# EAGLE board Retro-Lite-Dock-PCB_Front (EAGLE 9.6.1)
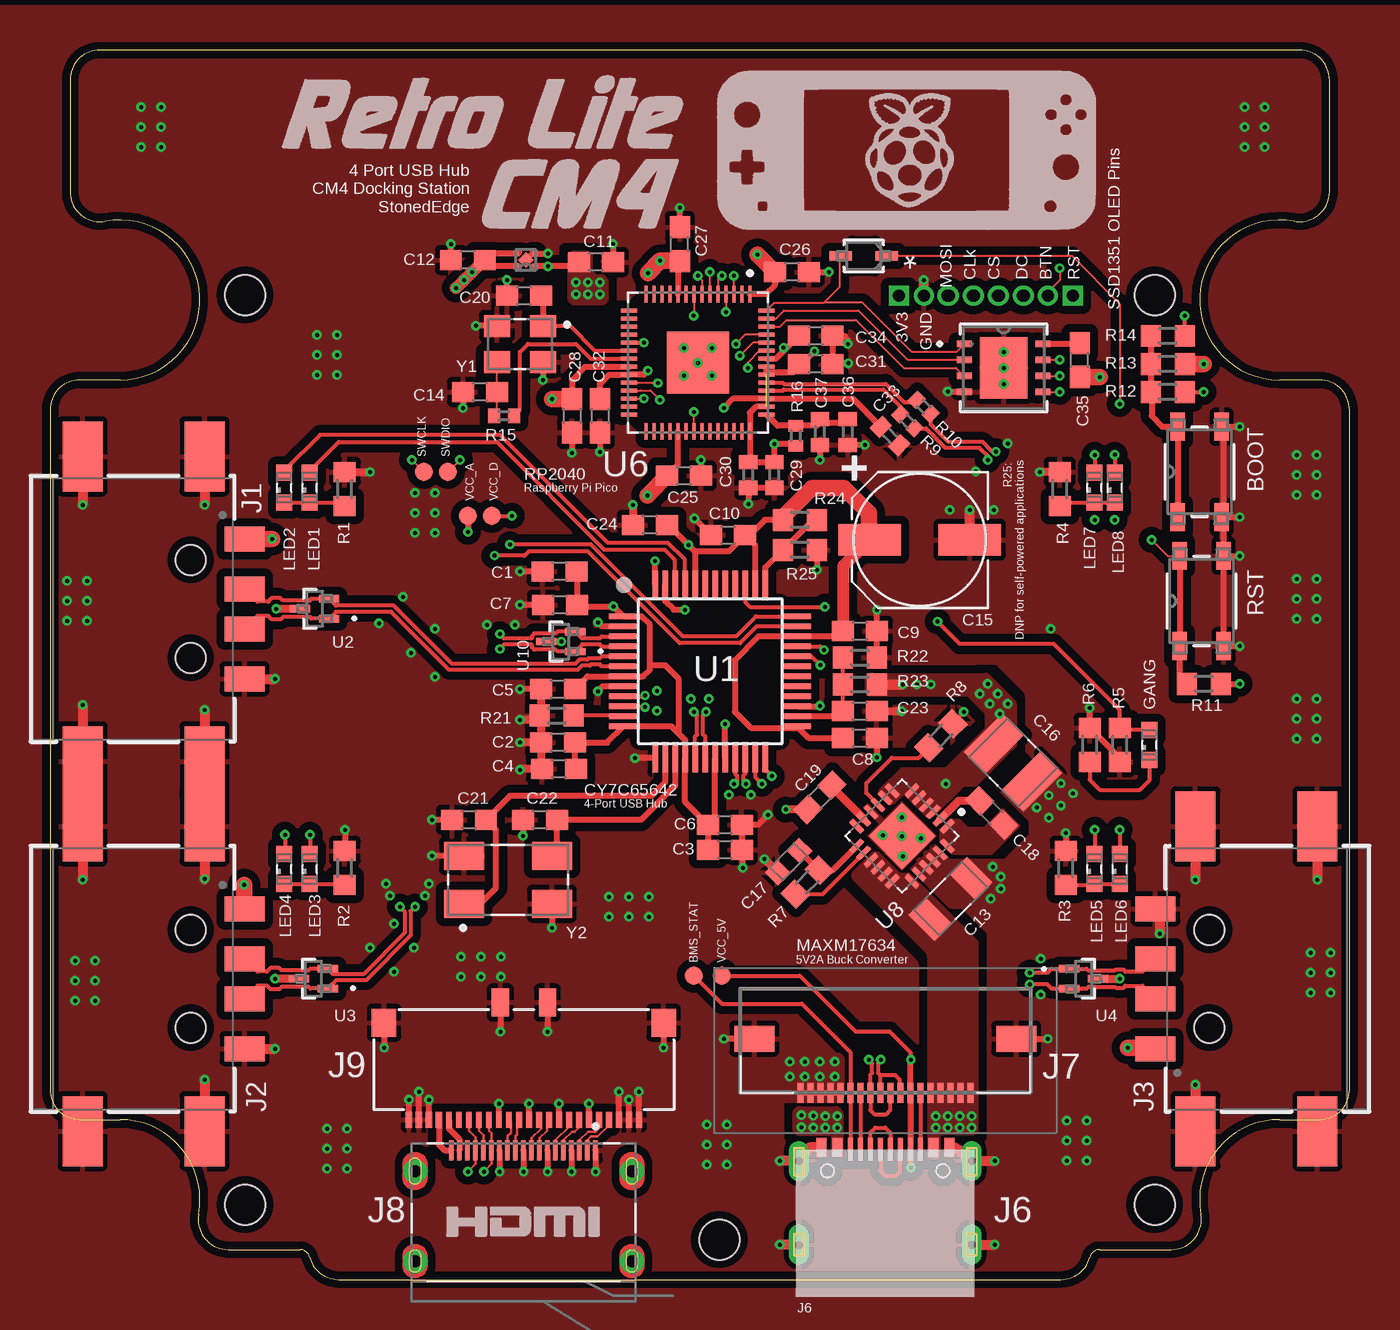
[diagram p0: board, top side]
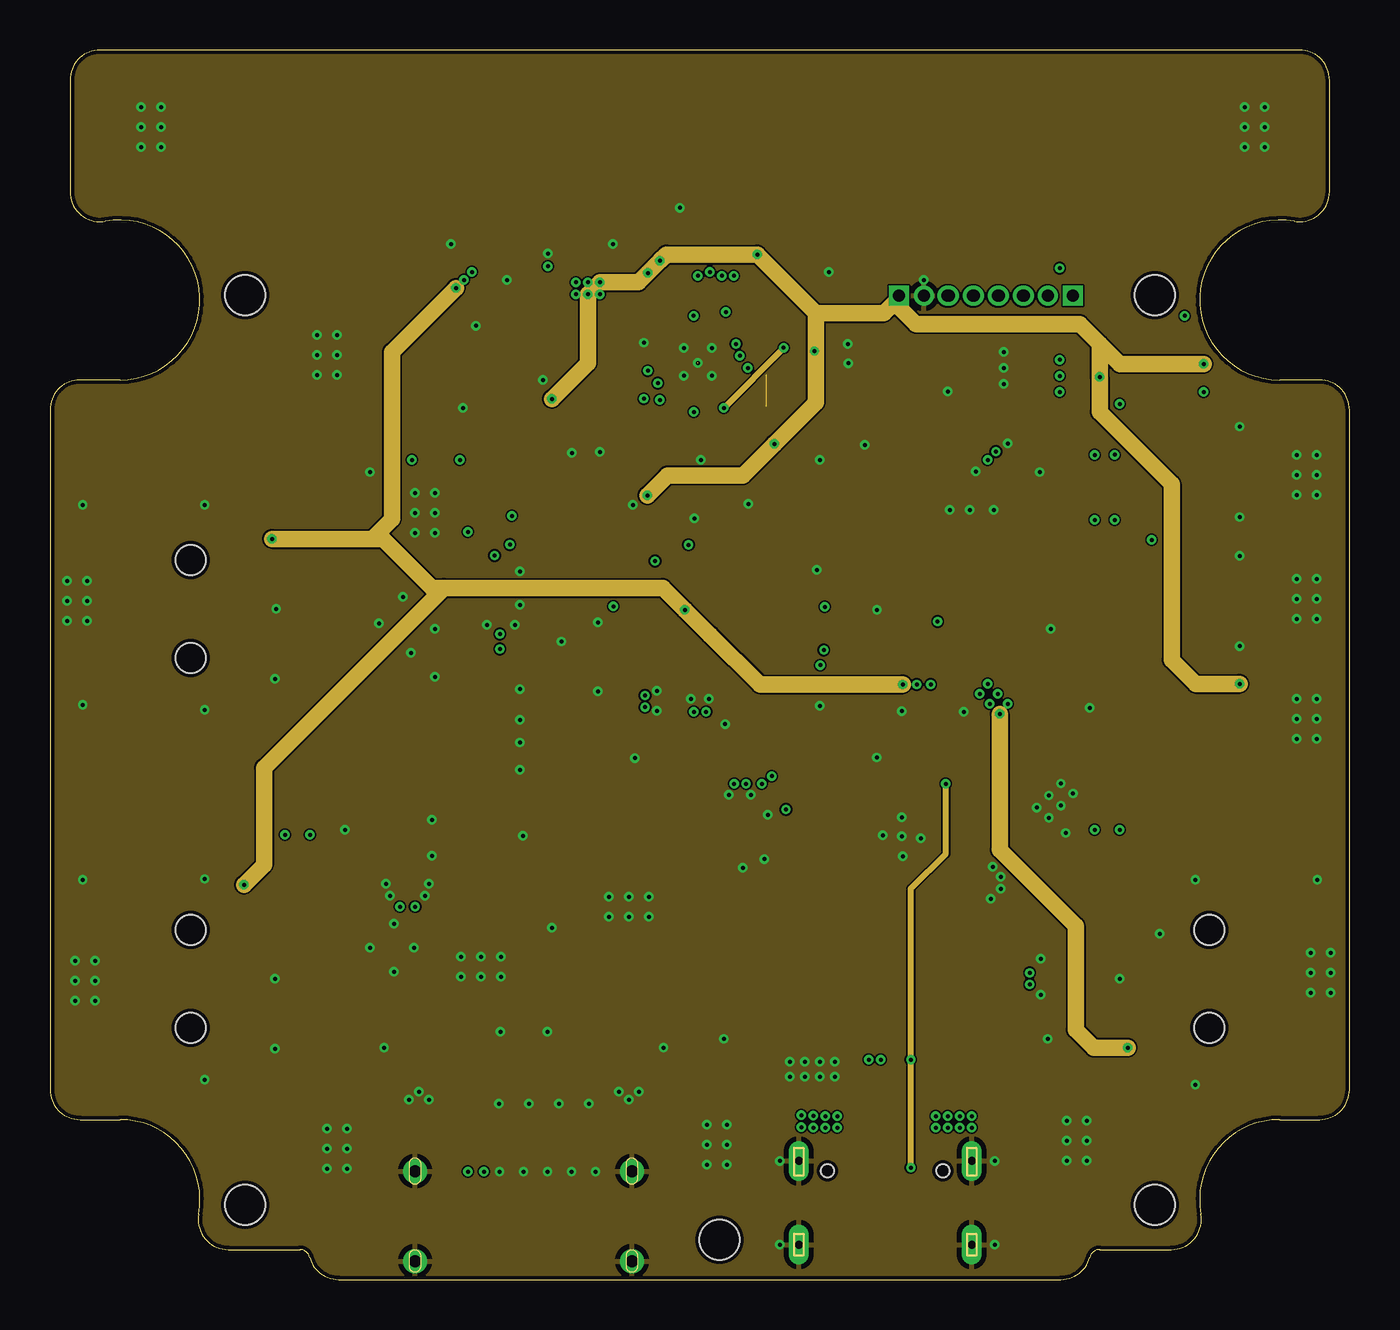
[diagram p1: board, inner layer Route2]
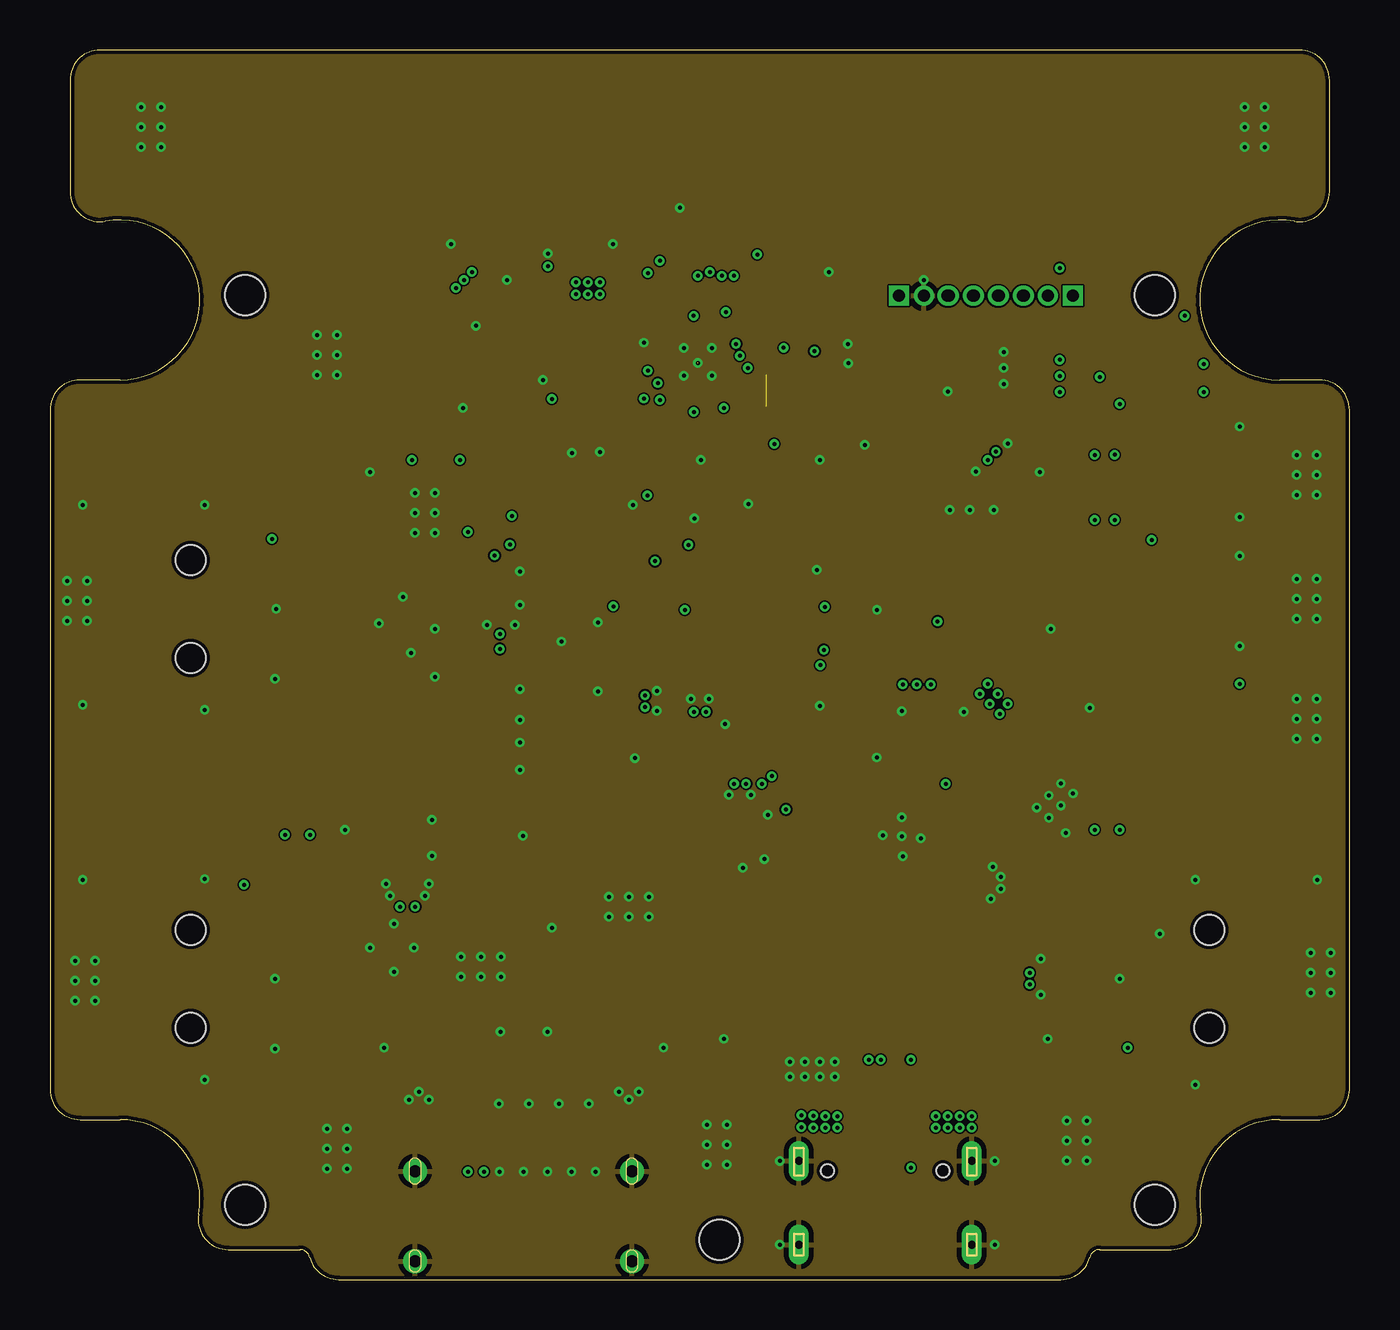
[diagram p2: board, inner layer Route15]
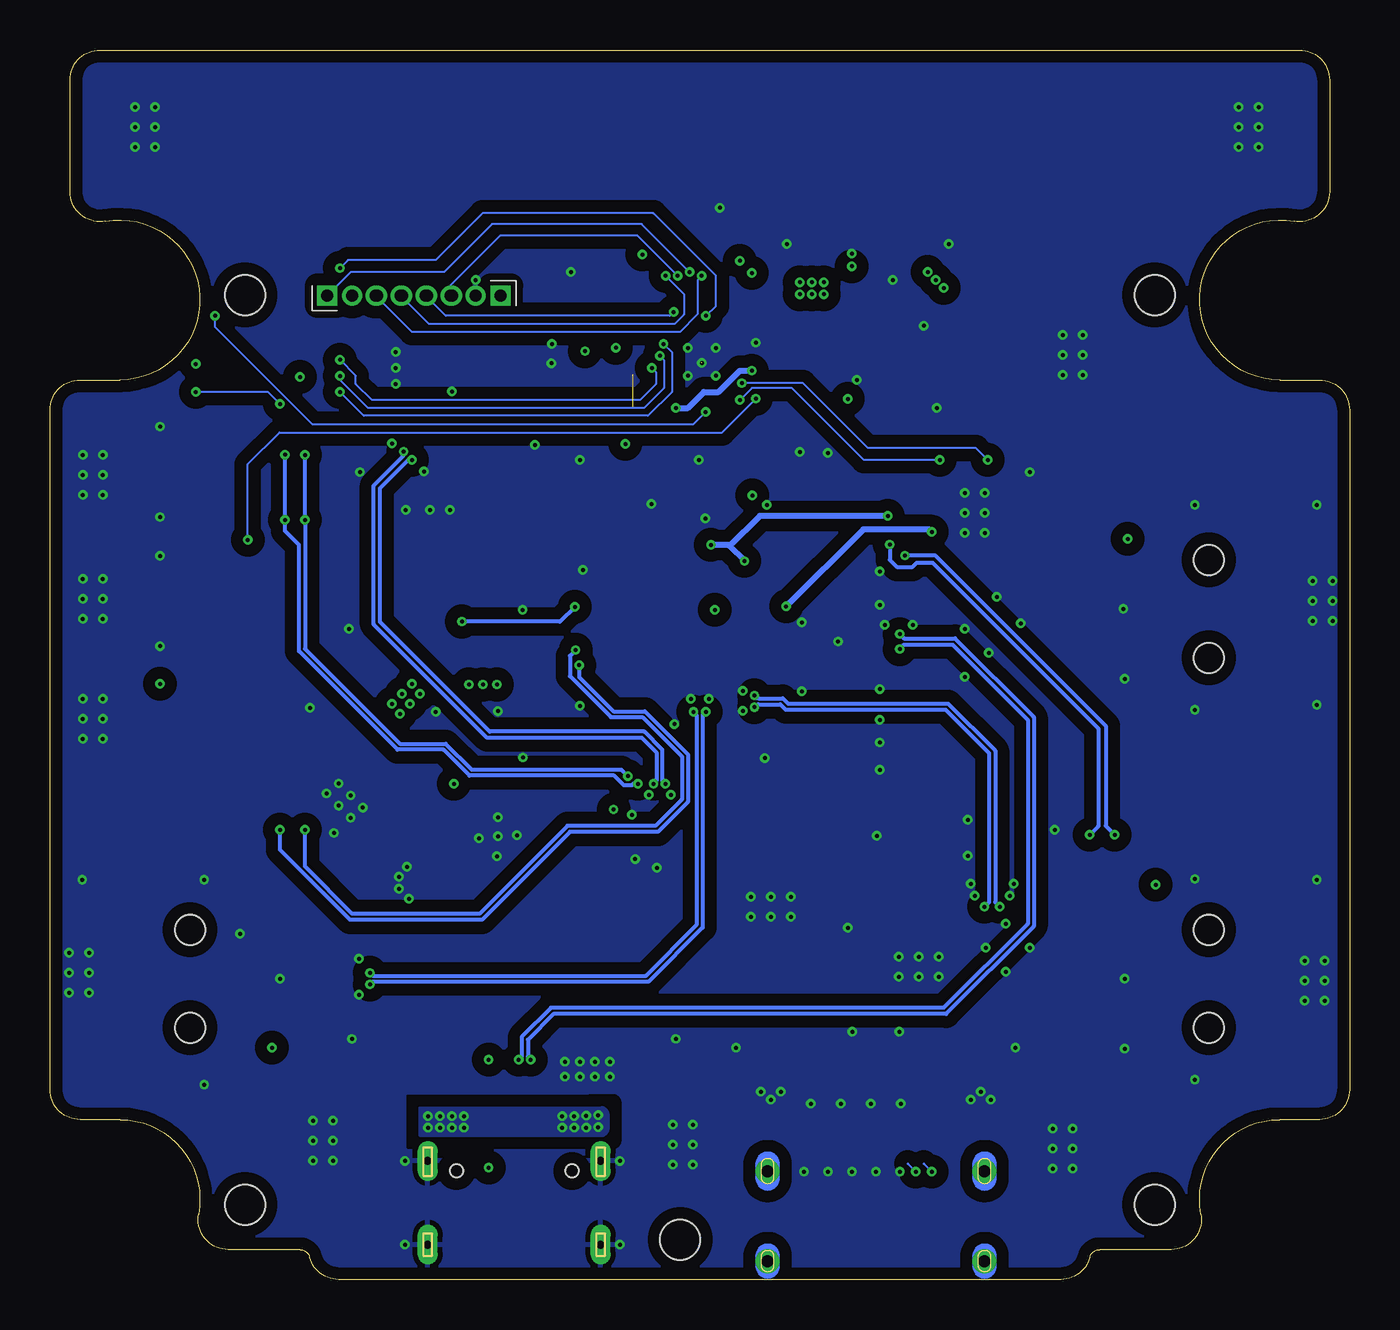
[diagram p3: board, bottom side, seen from below]

Size 65 x 61.5 mm. Coordinates in mm from the lower left corner, seen from the top.
Outline: 12.98,1.12 arc76 12.5,1.5 8.91,1.5 arc-100 7.43,3.27 arc100 3.5,8 1.5,8 arc-90 0,9.5 0,43.5 arc-90 1.5,45 3.5,45 arc190 2.77,52.93 arc-100 1,54.41 1,60 arc-90 2.5,61.5 62.5,61.5 arc-90 64,60 64,54.41 arc-100 62.23,52.93 arc190 61.5,45 63.5,45 arc-90 65,43.5 65,9.5 arc-90 63.5,8 61.5,8 arc100 57.57,3.27 arc-100 56.09,1.5 52.5,1.5 arc76 52.02,1.12 arc-76 50.56,0 14.44,0 arc-76 12.98,1.12
Copper layers (1+2*15+16): Top 0.035mm / dielectric 0.2mm / Route2 0.0175mm / dielectric 1.065mm / Route15 0.0175mm / dielectric 0.2mm / Bottom 0.035mm
Design rules "default *": minimum track width 3.5mil, minimum drill 0.2mm, track to track 3.5mil, track to pad 5mil, pad to pad 5mil, via to via 5mil, smd to smd 0mil, copper to edge 0.2mm, drill to drill 5mil, minimum pad ring 0.1mm, minimum via ring 0.13mm, stop-mask expansion 0mil, vias tented up to drill 100mil, thermal gap 10mil
Net classes: 1 USB2.0: width 0.192 mm, clearance 0.114 mm; 2 HDMI: width 0.126 mm, clearance 0.102 mm
Holes 2 mm at 55.25,3.75 9.75,3.75 55.25,49.25 9.75,49.25 33.48,2
tRestrict: area 29.5,43 to 35.3,48.8; area 29.5,27 to 36.5,33.8; 4 lines

## Footprints (pad centres in the part's own frame; a part is rotated, then mirrored left to right if it is on the bottom)
TP09R = smd 0.9 x 0.9: TP 0,0
C0603 = smd 1.1 x 1: 1 -0.85,0; 2 0.85,0
CAPC3216X180N = smd 1.21 x 1.82: 1 -1.45,0; 2 1.45,0
CAPAE660X610 = smd 3.112 x 1.579: 1 -2.5,0; 2 2.5,0
CAPC3225X270N = smd 1.53 x 2.72: 1 -1.341,0; 2 1.341,0
CAPC1608X90N = smd 0.89 x 0.93: 1 -0.77,0; 2 0.77,0
C0402 = smd 0.7 x 0.9: 1 -0.65,0; 2 0.65,0
USC_TOS = smd 1.111 x 0.451: 1 -1.15,0; 2 1.15,0
SML0603 = smd 0.8 x 0.8: A 0.75,0; C -0.75,0
629104190121 = smd 1.25 x 2: 1 -3.5,5.6; 2 -1,5.6; 3 1,5.6; 4 3.5,5.6 | smd 3.5 x 2: S1 -7.625,3.6; S2 7.625,3.6; S3 -7.625,-2.5; S4 7.625,-2.5 | hole 1.5: -2.45,2.9; 2.45,2.9
U262-161N-4BVC11 = smd 0.5 x 0.95: A1B12 -3.2,7.455; A4B9 -2.4,7.455; B1A12 3.2,7.455; B4A9 2.4,7.455 | smd 0.25 x 1.15: A5 -1.25,7.355; A6 -0.25,7.355; A7 0.25,7.355; A8 1.25,7.355; B5 1.75,7.355; B6 0.75,7.355; B7 -0.75,7.355; B8 -1.75,7.355 | drill 0.4 pad 1 long: SHIELD_1 -4.325,6.78; SHIELD_2 -4.325,2.6; SHIELD_3 4.325,6.78; SHIELD_4 4.325,2.6 | hole 0.65: -2.89,6.28; 2.89,6.28
5051101892 = smd 0.3 x 1: 1 -4.25,2.625; 2 -3.75,2.625; 3 -3.25,2.625; 4 -2.75,2.625; 5 -2.25,2.625; 6 -1.75,2.625; 7 -1.25,2.625; 8 -0.75,2.625; 9 -0.25,2.625; 10 0.25,2.625; 11 0.75,2.625; 12 1.25,2.625; 13 1.75,2.625; 14 2.25,2.625; 15 2.75,2.625; 16 3.25,2.625; 17 3.75,2.625; 18 4.25,2.625 | smd 2 x 1.3: MP1 -6.55,-0.075; MP2 6.55,-0.075
WURTH_685119136923 = smd 0.23 x 1: 1 3.6,0; 2 3.2,0; 3 2.8,0; 4 2.4,0; 5 2,0; 6 1.6,0; 7 1.2,0; 8 0.8,0; 9 0.4,0; 10 0,0; 11 -0.4,0; 12 -0.8,0; 13 -1.2,0; 14 -1.6,0; 15 -2,0; 16 -2.4,0; 17 -2.8,0; 18 -3.2,0; 19 -3.6,0 | drill 0.6 pad 1.2: S1 -5.425,-1.05; S2 -5.425,-5.55; S3 5.425,-5.55; S4 5.425,-1.05
R0603 = smd 1 x 1.1: 1 -0.85,0; 2 0.85,0
R0402 = smd 0.6 x 0.7: 1 -0.5,0; 2 0.5,0
SMD_025816_WRE = smd 1.397 x 0.711: 1 -2.261,1.1; 2 2.261,1.1; 3 -2.261,-1.1; 4 2.261,-1.1
TQFP-48 = smd 1.411 x 0.279: 1 -4.343,2.75; 2 -4.343,2.25; 3 -4.343,1.75; 4 -4.343,1.25; 5 -4.343,0.75; 6 -4.343,0.25; 7 -4.343,-0.25; 8 -4.343,-0.75; 9 -4.343,-1.25; 10 -4.343,-1.75; 11 -4.343,-2.25; 12 -4.343,-2.75; 25 4.343,-2.75; 26 4.343,-2.25; 27 4.343,-1.75; 28 4.343,-1.25; 29 4.343,-0.75; 30 4.343,-0.25; 31 4.343,0.25; 32 4.343,0.75; 33 4.343,1.25; 34 4.343,1.75; 35 4.343,2.25; 36 4.343,2.75 | smd 0.279 x 1.411: 13 -2.75,-4.343; 14 -2.25,-4.343; 15 -1.75,-4.343; 16 -1.25,-4.343; 17 -0.75,-4.343; 18 -0.25,-4.343; 19 0.25,-4.343; 20 0.75,-4.343; 21 1.25,-4.343; 22 1.75,-4.343; 23 2.25,-4.343; 24 2.75,-4.343; 37 2.75,4.343; 38 2.25,4.343; 39 1.75,4.343; 40 1.25,4.343; 41 0.75,4.343; 42 0.25,4.343; 43 -0.25,4.343; 44 -0.75,4.343; 45 -1.25,4.343; 46 -1.75,4.343; 47 -2.25,4.343; 48 -2.75,4.343
SC75-3L_SEM = smd 0.365 x 1.005: 1 -0.495,-0.724; 2 0.495,-0.724; 3 0,0.724
DFN_XGIQ_TR_WIN = smd 0.762 x 0.305: 1 -1.968,1.2; 2 -1.968,0.4; 3 -1.968,-0.4; 4 -1.968,-1.2; 5 1.968,-1.2; 6 1.968,-0.4; 7 1.968,0.4; 8 1.968,1.2 | smd 2.388 x 3.099: 9 0,0
QFN40P700X700X90-57N = smd 0.84 x 0.2: 1 -3.435,2.6; 2 -3.435,2.2; 3 -3.435,1.8; 4 -3.435,1.4; 5 -3.435,1; 6 -3.435,0.6; 7 -3.435,0.2; 8 -3.435,-0.2; 9 -3.435,-0.6; 10 -3.435,-1; 11 -3.435,-1.4; 12 -3.435,-1.8; 13 -3.435,-2.2; 14 -3.435,-2.6; 29 3.435,-2.6; 30 3.435,-2.2; 31 3.435,-1.8; 32 3.435,-1.4; 33 3.435,-1; 34 3.435,-0.6; 35 3.435,-0.2; 36 3.435,0.2; 37 3.435,0.6; 38 3.435,1; 39 3.435,1.4; 40 3.435,1.8; 41 3.435,2.2; 42 3.435,2.6 | smd 0.2 x 0.84: 15 -2.6,-3.435; 16 -2.2,-3.435; 17 -1.8,-3.435; 18 -1.4,-3.435; 19 -1,-3.435; 20 -0.6,-3.435; 21 -0.2,-3.435; 22 0.2,-3.435; 23 0.6,-3.435; 24 1,-3.435; 25 1.4,-3.435; 26 1.8,-3.435; 27 2.2,-3.435; 28 2.6,-3.435; 43 2.6,3.435; 44 2.2,3.435; 45 1.8,3.435; 46 1.4,3.435; 47 1,3.435; 48 0.6,3.435; 49 0.2,3.435; 50 -0.2,3.435; 51 -0.6,3.435; 52 -1,3.435; 53 -1.4,3.435; 54 -1.8,3.435; 55 -2.2,3.435; 56 -2.6,3.435 | smd 3.1 x 3.1: 57 0,0
XDFN4_711AJ_ONS = smd 0.229 x 0.254: 1 -0.483,0.324; 2 -0.483,-0.324; 3 0.483,-0.324; 4 0.483,0.324 | smd 0.533 x 0.533 rotated 45: 5 0,0
QFN50P400X400X180-25N = smd 0.81 x 0.27: 1 -1.95,1.25; 2 -1.95,0.75; 3 -1.95,0.25; 4 -1.95,-0.25; 5 -1.95,-0.75; 6 -1.95,-1.25; 13 1.95,-1.25; 14 1.95,-0.75; 15 1.95,-0.25; 16 1.95,0.25; 17 1.95,0.75; 18 1.95,1.25 | smd 0.27 x 0.81: 7 -1.25,-1.95; 8 -0.75,-1.95; 9 -0.25,-1.95; 10 0.25,-1.95; 11 0.75,-1.95; 12 1.25,-1.95; 19 1.25,1.95; 20 0.75,1.95; 21 0.25,1.95; 22 -0.25,1.95; 23 -0.75,1.95; 24 -1.25,1.95 | smd 2.35 x 2.35: 25 0,0
5022442430 = smd 0.3 x 0.8: 1 -5.75,0; 2 -5.25,0; 3 -4.75,0; 4 -4.25,0; 5 -3.75,0; 6 -3.25,0; 7 -2.75,0; 8 -2.25,0; 9 -1.75,0; 10 -1.25,0; 11 -0.75,0; 12 -0.25,0; 13 0.25,0; 14 0.75,0; 15 1.25,0; 16 1.75,0; 17 2.25,0; 18 2.75,0; 19 3.25,0; 20 3.75,0; 21 4.25,0; 22 4.75,0; 23 5.25,0; 24 5.75,0 | smd 1.22 x 1.4: P$25 -6.99,-4.85; P$26 6.99,-4.85 | smd 0.85 x 1.4: P$27 -1.175,-5.86; P$28 1.175,-5.86
1MM_PIC-PROGRAMING_HEADER = drill 0.6 pad 1 square: 1 -1.25,1 | drill 0.6 pad 1: 2 0,1; 3 1.25,1; 4 2.5,1; 5 3.75,1; 6 5.02,1
XTAL_ECS-120-18-33-JGN-TR3 = smd 1.3 x 1.1: 1 -1.15,-0.9; 2 1.15,-0.9; 3 1.15,0.9; 4 -1.15,0.9
XTAL_ECS-120-20-23B-TR = smd 2 x 1.4: 1 -2.2,-1.2; 2 2.2,-1.2; 3 2.2,1.2; 4 -2.2,1.2

## Placement (x,y rotation side)
BMS_STAT  TPTP09R  [TP09R]  32.2,15.2 0 top
C1  0.1uF  [C0603]  25.48,35.42 180 top
C2  0.1uF  [C0603]  25.4,26.86 180 top
C3  0.1uF  [C0603]  33.75,21.5 0 top
C4  0.1uF  [C0603]  25.45,25.55 180 top
C5  0.1uF  [C0603]  25.4,29.53 180 top
C6  0.1uF  [C0603]  33.75,22.75 0 top
C7  0.1uF  [C0603]  25.5,33.75 180 top
C8  0.1uF  [C0603]  40.5,27.09 0 top
C9  0.1uF  [C0603]  40.51,32.44 0 top
C10  0.1uF  [C0603]  33.92,37.23 180 top
C11  0.1uF  [C0603]  27.3,50.9 0 top
C12  0.1uF  [C0603]  20.9,51 180 top
C13  4.7uF  [CAPC3216X180N]  45.04,19.04 45 top
C14  0.1uF  [C0603]  21.5,44.4 180 top
C15  10uF  [CAPAE660X610]  43.5,37 0 top
C16  22uF  [CAPC3225X270N]  48.16,25.86 135 top
C17  2.2uF  [CAPC1608X90N]  36.94,20.9 45 top
C18  0.1uF  [C0603]  47.1,23.34 135 top
C19  5600pF  [C0603]  38.5,24.12 45 top
C20  0.1uF  [C0603]  23.7,49.2 180 top
C21  20pF  [C0603]  20.95,23 180 top
C22  20pF  [C0603]  24.5,23 180 top
C23  1uF  [C0603]  40.5,28.43 0 top
C24  0.1uF  [C0603]  30,37.75 180 top
C25  0.1uF  [C0603]  31.7,40.2 0 top
C26  0.1uF  [C0603]  37.1,50.4 0 top
C27  0.1uF  [C0603]  31.5,51.8 90 top
C28  0.1uF  [C0603]  26.1,43.2 270 top
C29  1uF  [C0402]  36.23,40.25 270 top
C30  0.1uF  [C0402]  34.92,40.25 270 top
C31  0.1uF  [C0603]  38.3,45.8 0 top
C32  1uF  [C0603]  27.5,43.2 270 top
C33  0.1uF  [C0402]  42.02,42.19 315 top
C34  0.1uF  [C0603]  38.3,47.2 0 top
C35  0.1uF  [C0603]  51.5,46 90 top
C36  1uF  [C0402]  39.9,42.4 270 top
C37  0.1uF  [C0402]  38.5,42.4 270 top
CR1  CUS551V30  [USC_TOS]  40.7,51.2 180 top
GANG  [SML0603]  54.99,26.75 90 top
J1  629104190121  [629104190121]  4.13,33.55 270 top
J2  629104190121  [629104190121]  4.13,15.05 270 top
J3  629104190121  [629104190121]  60.89,15.05 90 top
J6  U262-161N-4BVC11  [U262-161N-4BVC11]  41.78,-0.85 0 top
J7  505110-1892  [5051101892]  41.78,11.96 180 top
J8  685119136923  [WURTH_685119136923]  23.68,6.47 0 top
LED1  [SML0603]  12.99,39.6 90 top
LED2  [SML0603]  11.72,39.6 90 top
LED3  [SML0603]  12.99,20.53 90 top
LED4  [SML0603]  11.72,20.53 90 top
LED5  [SML0603]  52.24,20.53 90 top
LED6  [SML0603]  53.51,20.53 90 top
LED7  [SML0603]  52.24,39.6 90 top
LED8  [SML0603]  53.26,39.6 90 top
R1  680  [R0603]  14.74,39.54 270 top
R2  680  [R0603]  14.74,20.59 270 top
R3  680  [R0603]  50.8,20.59 270 top
R4  680  [R0603]  50.5,39.54 270 top
R5  100k  [R0603]  53.5,26.75 90 top
R6  680  [R0603]  52,26.75 270 top
R7  100k  [R0603]  37.87,19.87 225 top
R8  19.1k  [R0603]  44.56,27.2 45 top
R9  27R4  [R0402]  42.88,42.92 135 top
R10  27R4  [R0402]  43.69,43.65 135 top
R11  10k  [R0603]  57.7,29.8 0 top
R12  1K  [R0603]  55.9,44.4 0 top
R13  10k  [R0603]  55.9,45.8 180 top
R14  10k  [R0603]  55.9,47.2 0 top
R15  1k  [R0402]  22.7,43.2 180 top
R16  27.4  [R0402]  37.3,42.2 270 top
R21  649  [R0603]  25.35,28.2 0 top
R22  47k  [R0603]  40.51,31.1 180 top
R23  10k  [R0603]  40.5,29.76 0 top
R24  510k  [R0603]  37.5,38 180 top
R25  0  [R0603]  37.5,36.5 180 top
S1  434133025816  [SMD_025816_WRE]  57.6,33.94 90 top
SWCLK  TPTP09R  [TP09R]  18.7,40.4 0 top
SWDIO  TPTP09R  [TP09R]  19.9,40.4 0 top
U1  USB-4PORT  [TQFP-48]  33.02,30.42 0 top
U2  RCLAMP0582BQTCT  [SC75-3L_SEM]  13.24,33.55 90 top
U3  RCLAMP0582BQTCT  [SC75-3L_SEM]  13.18,15.05 90 top
U4  RCLAMP0582BQTCT  [SC75-3L_SEM]  51.7,15.05 270 top
U5  W25Q64JVXGIQ_TR  [DFN_XGIQ_TR_WIN]  47.7,45.6 0 top
U6  RP2040  [QFN40P700X700X90-57N]  32.4,45.86 270 top
U7  NCP115AMX330TBG  [XDFN4_711AJ_ONS]  23.8,51 180 top
U8  MAXM17634AMGT  [QFN50P400X400X180-25N]  42.62,22.18 225 top
U9  434133025816  [SMD_025816_WRE]  57.5,40.4 90 top
U10  RCLAMP0582BQTCT  [SC75-3L_SEM]  25.55,31.91 90 top
U$1  5022442430_FFC  [5022442430]  23.7,8 180 top
U$2  6PINEADER  [1MM_PIC-PROGRAMING_HEADER]  49.9,50.2 180 top
U$3  6PINEADER  [1MM_PIC-PROGRAMING_HEADER]  43.7,48.2 0 top
VCC_5V  TPTP09R  [TP09R]  33.6,15.2 0 top
VCC_A  TPTP09R  [TP09R]  20.9,38.2 0 top
VCC_D  TPTP09R  [TP09R]  22.1,38.2 0 top
Y1  ECS-120-18-33-JGN-TR3  [XTAL_ECS-120-18-33-JGN-TR3]  23.5,46.8 180 top
Y2  ECS-120-20-23B-TR  [XTAL_ECS-120-20-23B-TR]  22.9,20 0 top

## Library data of the parts
BMS_STAT SWCLK SWDIO VCC_5V VCC_A VCC_D = testpad
C1-C12 C14 C18-C37 = rcl; SPICEPREFIX: C
C13 = GRM31CR71H475KA12K; DESCRIPTION: SMD Capacitor X7R(EIA) with Capacitance: 4.7uF Tol. 10%. Rated Voltage: 50Vdc; DIGI-KEY_PART_NUMBER: 490-GRM31CR71H475KA12KTR-ND; MF: Murata; MP: GRM31CR71H475KA12K; PACKAGE: 3216 Murata; PURCHASE-URL: https://pricing.snapeda.com/search/part/GRM31CR71H475KA12K/?ref=eda
C15 = LCD_Driver
C16 = GRM32ER71E226KE15K; AVAILABILITY: In Stock; DESCRIPTION: SMD capacitor X7R(EIA) with capacitance 22uF Tol.10%. Rated voltage 25Vdc 125C; MF: Murata; MP: GRM32ER71E226KE15K; PACKAGE: 3225 Murata; PRICE: None; PURCHASE-URL: https://pricing.snapeda.com/search/part/GRM32ER71E226KE15K/?ref=eda
C17 = GRM188R70J225KE15J; AVAILABILITY: In Stock; DESCRIPTION: SMD capacitor X7R(EIA) with capacitance 2.2uF Tol.10%. Rated voltage 6.3Vdc 125C; MF: Murata; MP: GRM188R70J225KE15J; PACKAGE: 1608 Murata; PRICE: None; PURCHASE-URL: https://pricing.snapeda.com/search/part/GRM188R70J225KE15J/?ref=eda
CR1 = CUS551V30H3FCT-ND; COPYRIGHT: Copyright (C) 2022 Ultra Librarian. All rights reserved.; DIGI-KEY_PART_NUMBER_1: CUS551V30H3FCT-ND; DIGI-KEY_PART_NUMBER_2: CUS551V30H3FDKR-ND; DIGI-KEY_PART_NUMBER_3: CUS551V30H3FTR-ND; MANUFACTURER_PART_NUMBER: CUS551V30; MFR_NAME: Toshiba Electronic Devices & Storage Corp.
GANG LED1-LED8 = led
J1-J3 = 629104190121; AVAILABILITY: In Stock; DESCRIPTION: USB-A (USB TYPE-A) USB 2.0 Receptacle Connector 4 Position Surface Mount, Right Angle; MF: Würth Elektronik; MP: 629104190121; PACKAGE: None; PRICE: None
J6 = gustl_U262-161N-4BVC11
J7 = 505110-1892; DESCRIPTION: Molex Easy-On Series 0.5mm Pitch 18 Way Right Angle SMT Male FPC Connector, ZIF Bottom Contact; HEIGHT: 2.1mm; MANUFACTURER_NAME: Molex; MANUFACTURER_PART_NUMBER: 505110-1892; MOUSER_PART_NUMBER: 538-505110-1892; MOUSER_PRICE-STOCK: https://www.mouser.com/Search/Refine.aspx?Keyword=538-505110-1892
J8 = 685119136923; AVAILABILITY: In Stock; DESCRIPTION: HDMI - Mini - Receptacle Connector 19 Position Surface Mount, Right Angle; Through Hole; MF: Wurth Electronics; MP: 685119136923; PACKAGE: None; PRICE: None; PURCHASE-URL: https://pricing.snapeda.com/search/part/685119136923/?ref=eda
R1-R16 R21-R25 = rcl; SPICEPREFIX: R
S1 U9 = TACT; COPYRIGHT: Copyright (C) 2022 Ultra Librarian. All rights reserved.; DIGI-KEY_PART_NUMBER_1: 732-13663-2-ND; DIGI-KEY_PART_NUMBER_2: 732-13663-1-ND; DIGI-KEY_PART_NUMBER_3: 732-13663-6-ND; MANUFACTURER_PART_NUMBER: 434133025816; MFR_NAME: Wurth Electronics
U1 = 78171-0005
U2-U4 U10 = Semtech RClamp0582B; BUILT_BY: EMA_Justin; COPYRIGHT: Copyright (C) 2018 Accelerated Designs. All rights reserved; MANUFACTURER_PART_NUMBER: RCLAMP0582BQTCT; SOURCELIBRARY: Semtech_2019-11-26; VENDOR: Semtech Corporation
U5 = W25Q64JVXGIQ; COPYRIGHT: Copyright (C) 2022 Ultra Librarian. All rights reserved.; DIGI-KEY_PART_NUMBER_1: 256-W25Q64JVXGIQTR-ND; MANUFACTURER_PART_NUMBER: W25Q64JVXGIQ TR; MFR_NAME: Winbond
U6 = RP2040; AVAILABILITY: In Stock; DESCRIPTION: RP2040 chip for Raspberry Pi Pico - ARM® Cortex®-M0+ MCU 32-Bit; MF: Raspberry Pi; MP: RP2040; PACKAGE: None; PRICE: None; PURCHASE-URL: https://pricing.snapeda.com/search/part/RP2040/?ref=eda
U7 = NCP115AMX330TBG; COPYRIGHT: Copyright (C) 2022 Ultra Librarian. All rights reserved.; DIGI-KEY_PART_NUMBER_1: NCP115AMX330TBG-ND; MANUFACTURER_PART_NUMBER: NCP115AMX330TBG; MFR_NAME: onsemi
U8 = MAXM17634AMGT; AVAILABILITY: In Stock; DESCRIPTION: DC DC CONVERTER 5V 2A; MF: Analog Devices Inc./Maxim Integrated; MP: MAXM17634AMG; PACKAGE: None; PRICE: None; PURCHASE-URL: https://pricing.snapeda.com/search/part/MAXM17634AMG/?ref=eda
U$1 = 5022442430
U$2 U$3 = ayys
Y1 = ECS-120-18-33-JGN-TR3; MF: ECS Inc.; MP: ECS-120-18-33-JGN-TR3; PACKAGE: None; PURCHASE-URL: https://pricing.snapeda.com/search/part/ECS-120-18-33-JGN-TR3/?ref=eda
Y2 = ECS-120-20-23B-TR; DESCRIPTION: 12 MHz ±30ppm Crystal 20pF 50 Ohms 4-SMD, No Lead; DIGI-KEY_PART_NUMBER: XC1013TR-ND; MF: ECS Inc.; MP: ECS-120-20-23B-TR; PACKAGE: SMD-4 ECS International; PURCHASE-URL: https://pricing.snapeda.com/search/part/ECS-120-20-23B-TR/?ref=eda

## Nets
3V3: C11.1 C25.1 C26.1 C27.1 C28.1 C29.1 C30.1 C31.1 C35.1 R11.2 R13.1 R16.2 U6.1 U6.10 U6.22 U6.33 U6.42 U6.44 U6.48 U6.49 U7.1 U$3.1
AMBER_1: LED1.A U1.46
AMBER_2: LED3.A U1.36
AMBER_3: LED5.A U1.33
AMBER_4: LED7.A U1.24
BMS_STAT: BMS_STAT.TP J6.B8 J7.13
CC1: J6.A5 J7.12
CC2: J6.B5 J7.6
DD0_N [USB2.0]: J7.9 J7.11 U1.3 U10.2
DD0_N1 [USB2.0]: J6.A7 J6.B7
DD0_P [USB2.0]: J7.8 J7.10 U1.4 U10.1
DD0_P1 [USB2.0]: J6.A6 J6.B6
DD1_N [USB2.0]: J1.2 U1.5 U2.2
DD1_P [USB2.0]: J1.3 U1.6 U2.1
DD2_N [USB2.0]: J2.2 U1.9 U3.2
DD2_P [USB2.0]: J2.3 U1.10 U3.1
DD3_N [USB2.0]: J3.2 U1.17 U4.2
DD3_P [USB2.0]: J3.3 U1.18 U4.1
DD4_N [USB2.0]: R9.1 U1.21
DD4_P [USB2.0]: R10.1 U1.22
GANG: GANG.A R5.2 U1.39
GND: C1.2 C2.2 C3.2 C4.2 C5.2 C6.2 C7.2 C8.2 C9.2 C10.2 C11.2 C12.2 C13.2 C14.2 C15.2 C16.1 C17.1 C20.2 C21.2 C22.2 C23.2 C24.2 C25.2 C26.2 C27.2 C28.2 C29.2 C30.2 C31.2 C32.2 C33.2 C34.2 C36.2 C37.2 J1.4 J1.S1 J1.S2 J1.S3 J1.S4 J2.4 J2.S1 J2.S2 J2.S3 J2.S4 J3.4 J3.S1 J3.S2 J3.S3 J3.S4 J6.A1B12 J6.B1A12 J6.SHIELD_1 J6.SHIELD_2 J6.SHIELD_3 J6.SHIELD_4 J7.14 J7.15 J7.16 J7.17 J7.18 J7.MP1 J7.MP2 J8.1 J8.4 J8.7 J8.10 J8.13 J8.S1 J8.S2 J8.S3 J8.S4 R1.1 R2.1 R3.1 R4.1 R5.1 R6.1 R8.2 R21.1 R22.1 R25.1 S1.3 S1.4 U1.2 U1.8 U1.13 U1.20 U1.27 U2.3 U3.3 U4.3 U5.4 U5.9 U6.19 U6.57 U7.2 U7.5 U8.10 U8.20 U8.21 U8.22 U8.23 U8.25 U9.3 U9.4 U10.3 U$1.1 U$1.2 U$1.3 U$1.6 U$1.9 U$1.12 U$1.15 U$1.22 U$1.23 U$1.24 U$1.P$25 U$1.P$26 U$1.P$27 U$1.P$28 U$3.2 Y1.2 Y1.4 Y2.2 Y2.4
GND\: C19.1
GPIO0: U6.2
GPIO1/CS: U6.3 U$3.5
GPIO2/CLK: U6.4 U$3.4
GPIO3/MOSI: U6.5 U$3.3
GPIO4/RST: U6.6 U$2.1
GPIO5/DC: U6.7 U$3.6
GPIO6/BTN: U6.8 U$2.2
GPIO7: U6.9
GREEN_1: LED2.A U1.45
GREEN_2: LED4.A U1.35
GREEN_3: LED6.A U1.32
GREEN_4: LED8.A U1.23
HDMI1_CEC: J8.14 U$1.16
HDMI1_CLK_N [HDMI]: J8.12 U$1.14
HDMI1_CLK_P [HDMI]: J8.11 U$1.13
HDMI1_HOTPLUG: J8.19 U$1.21
HDMI1_SCL: J8.15 U$1.17
HDMI1_SDA: J8.16 U$1.18
HDMI1_TX0_N [HDMI]: J8.9 U$1.11
HDMI1_TX0_P [HDMI]: J8.8 U$1.10
HDMI1_TX1_N [HDMI]: J8.6 U$1.8
HDMI1_TX1_P [HDMI]: J8.5 U$1.7
HDMI1_TX2_N [HDMI]: J8.3 U$1.5
HDMI1_TX2_P [HDMI]: J8.2 U$1.4
HDMI_5.0V: J8.18 U$1.20
N$1: GANG.C R6.2
N$2: LED1.C LED2.C R1.2
N$3: C21.1 U1.14 Y2.1
N$4: C22.1 U1.15 Y2.3
N$5: C32.1 C33.1 C34.1 U6.23 U6.45 U6.50
N$5_N: R9.2 U6.46
N$5_P: R10.2 U6.47
N$6: LED3.C LED4.C R2.2
N$7: LED5.C LED6.C R3.2
N$8: R7.2 U8.14
N$9: LED7.C LED8.C R4.2
N$10: C35.2 U5.8
N$11: C18.2 U8.2
N$12: C18.1 U8.1 U8.24
N$13: C19.2 U8.11
N$14: R8.1 U8.9
N$15: R12.1 R13.2 R14.1 U9.1 U9.2
N$16: C14.1 R15.2 Y1.3
N$17: C36.1 C37.1 R16.1 U6.43
N$18: CR1.1 R12.2
N$34: R21.2 U1.11
N$35: C23.1 R22.2 R23.1 U1.26
N$36: R24.1 R25.2 U1.37
NC: U$1.19
NENP1: U1.43
NENP2: U1.41
NENP3: U1.31
NENP4: U1.29
NOVRP1: U1.42
NOVRP2: U1.40
NOVRP3: U1.30
NOVRP4: U1.28
QSPI_CS: CR1.2 U5.1 U6.56
QSPI_SCLK: U5.6 U6.52
QSPI_SD0: U5.5 U6.53
QSPI_SD1: U5.2 U6.55
QSPI_SD2: U5.3 U6.54
QSPI_SD3: U5.7 U6.51
RUN: R11.1 S1.1 S1.2 U6.26
SWCLK: SWCLK.TP U6.24
SWDIO: SWDIO.TP U6.25
USER_SW: R14.2 U6.35
VBUS: C13.1 J6.A4B9 J6.B4A9 J7.1 J7.2 J7.3 J7.4 J7.5 U8.15 U8.16 U8.17 U8.18 U8.19
VCC: C17.2 R7.1 U8.13
VCC_5V: C12.1 C16.2 J1.1 J2.1 J3.1 J6.A8 J7.7 R23.2 U1.47 U7.3 U7.4 U8.3 U8.4 U8.5 U8.6 U8.7 U8.8 VCC_5V.TP
VCC_A: C1.1 C2.1 C3.1 C4.1 C5.1 C6.1 C7.1 U1.1 U1.7 U1.12 U1.16 U1.19 VCC_A.TP
VCC_D: C8.1 C9.1 C10.1 C15.1 C24.1 R24.2 U1.25 U1.34 U1.38 U1.44 U1.48 VCC_D.TP
XTAL_IN: C20.1 U6.20 Y1.1
XTAL_OUT: R15.1 U6.21

## Tracks (layer width: path | path; a pad name or v marks a point on that pad's centre or on a via)
3V3  (via drill 0.2)  (1 unrouted)
  Top 0.305: C25.1 31.4,40.75 U6.33 | C27.1 31.4,50.85 U6.10 | C26.1 36.25,49.75 35.79,49.29 U6.1 | C11.1 26.23,50.68 v24.9,50.68 U7.1 | C28.1 26.1,45 26.76,45.66 U6.22 | U6.44 35.31,43.66 35,43.35 U6.42 35,40.98 C30.1 C29.1 v36.23,41.8 37.2,41.8 R16.2 | 37.6,45.8 37.62,45.8 37.48,45.66 | R11.2 v59.5,29.8 | C31.1 37.6,45.8 | 37.6,45.8 v38.24,46.44 | U6.48 35.84,45.4 | 35.84,45.4 U6.49 | 35.84,45.4 37.2,45.4 37.6,45.8
  Top 0.813: C26.1 v35.38,51.27 | C25.1 v29.88,39.23 | C28.1 v25.1,44.05 | C27.1 v30.5,50.95 v29.9,50.35 | v52.5,45.15 C35.1 | R13.1 v57.7,45.8
  Route2 0.813: v25.1,44.05 26.9,45.85 v26.9,49.28 v27.5,49.88 29.43,49.88 v30.5,50.95 30.82,51.27 v35.38,51.27 38.3,48.35 | 52.5,46.8 v52.5,45.15 52.5,43.4 56.1,39.8 56.1,31 57.3,29.8 v59.5,29.8 | 42.5,49.15 U$3.1 | 52.5,46.8 51.5,47.8 43.3,47.8 42.5,48.6 42.5,49.15 | v57.7,45.8 53.5,45.8 52.5,46.8 | 38.3,48.35 38.3,43.88 v36.23,41.8 34.65,40.23 30.88,40.23 v29.88,39.23 | 38.3,48.35 41.7,48.35 42.5,49.15
  other vias: 26.3,49.88 26.9,49.88 27.5,49.28 26.3,49.28
  pour Top (no thermals): 25.9,51.2 25.9,49 26.1,48.8 27.7,48.8 27.9,49 27.9,49.8 27.9,50 27.7,50.2 27.3,50.2 27.1,50.4 27.1,51.2 26.9,51.4 26.1,51.4
AMBER_1
  Top 0.203: U1.46 31.25,34.78 31.25,36 30.75,36.5 27.75,36.5 22.35,41.89 14.44,41.89 12.99,40.44 LED1.A
AMBER_2  (via drill 0.2 pad 0.45)
  Top 0.203: U1.36 35.3,33.17 34.33,32.19 31.64,32.19 27.06,36.77 v23,36.77 | v13,22.25 LED3.A
  Bottom 0.203: v13,22.25 12.57,22.68 12.57,27.57 20.86,35.85 21.65,35.85 21.85,35.65 22.65,35.65 23,36 v23,36.77
AMBER_3  (via drill 0.2 pad 0.45)
  Top 0.203: U1.33 38.52,31.67 v38.71,31.49 | v52.25,22.5 LED5.A
  Bottom 0.203: v38.71,31.49 39,31.19 39,30.19 36.94,28.12 35.37,28.12 33.39,26.15 33.39,24.02 34.72,22.69 39.12,22.69 43.52,18.29 49.88,18.29 52.25,20.66 v52.25,22.5
AMBER_4  (via drill 0.2 pad 0.45)
  Top 0.203: v52.25,41.25 52.25,40.36 LED7.A | U1.24 35.77,25.48 35.8,25.45 35.8,25.48 v36.1,25.18
  Bottom 0.203: v52.25,41.25 v52.25,38 52.25,31.55 47.5,26.8 45.2,26.8 43.9,25.5 36.42,25.5 v36.1,25.18
BMS_STAT
  Top 0.203: J6.B8 J7.13 40.03,11.37 37.6,13.8 33.6,13.8 BMS_STAT.TP
CC1
  Top 0.203: J7.12 J6.A5
CC2
  Top 0.203: J7.6 J6.B5
DD0_N  (via drill 0.2 pad 0.45)
  Top 0.192: v22.5,32.28 22.5,32.26 22.7,32.06 24.1,32.06 24.1,32.19 24.23,32.31 25.3,32.31 25.39,32.41 U10.2 26.61,32.07 26.7,32.07 27.49,32.07 27.59,32.17 U1.3 | v40.95,11 41.1,10.85 41.1,10.81 41.12,10.79 41.12,10.32 41.03,10.22 J7.11 41.03,8.47 41.23,8.28 41.83,8.28 42.03,8.48 J7.9
  Bottom 0.192: v22.5,32.28 22.28,32.06 19.73,32.06 15.79,28.13 15.79,17.67 20.18,13.28 39.82,13.28 41.1,12 41.1,11.15 v40.95,11
DD0_N1
  Top 0.192: J6.B7 41.03,7.35 41.27,7.6 41.77,7.6 42.03,7.35 J6.A7
DD0_P  (via drill 0.2 pad 0.45)
  Top 0.192: v22.5,31.54 22.5,31.56 22.7,31.76 24.1,31.76 24.1,31.64 24.23,31.5 25.3,31.5 25.39,31.41 U10.1 26.63,31.77 27.49,31.77 27.59,31.67 U1.4 | J7.10 41.53,10.22 | 41.53,10.22 41.43,10.32 41.43,10.88 v41.55,11 | J7.8 42.5,9.37 42.5,10 42.28,10.22 41.53,10.22
  Bottom 0.192: v22.5,31.54 22.28,31.76 19.86,31.76 16.1,28 16.1,17.8 20.31,13.59 39.94,13.59 41.41,12.13 41.41,11.15 v41.55,11
DD0_P1
  Top 0.192: J6.A6 41.53,5.45 41.77,5.2 42.3,5.2 42.53,5.43 J6.B6
DD1_N
  Top 0.192: U1.5 27.59,31.17 27.49,31.07 26.93,31.07 26.87,31.01 26.48,31.01 26.27,30.8 20.1,30.8 17.19,33.71 14.3,33.71 U2.2 13.08,34.05 12.99,33.95 12.7,33.95 12.69,33.96 11.64,33.96 11.53,34.08 11.09,34.08 10.91,33.9 10.38,33.9 J1.2
DD1_P
  Top 0.192: U1.6 27.59,30.67 27.49,30.77 27.06,30.77 27,30.7 26.6,30.7 26.39,30.49 19.97,30.49 17.07,33.4 14.31,33.4 U2.1 13.08,33.05 12.99,33.15 12.7,33.15 12.69,33.14 11.64,33.14 11.53,33.02 11.09,33.02 10.91,33.2 10.38,33.2 J1.3
DD2_N  (via drill 0.2 pad 0.45)
  Top 0.192: v17.5,18.65 17.73,18.42 17.73,17.33 15.68,15.28 14.17,15.28 U3.2 13.01,15.54 12.92,15.46 12.63,15.46 12.62,15.46 11.58,15.46 11.47,15.58 11.03,15.58 10.86,15.4 10.38,15.4 J2.2 | U1.9 29.77,29.17 v29.77,29.21
  Bottom 0.192: v17.5,18.65 17.72,18.87 17.72,26.45 20.07,28.8 28.07,28.8 28.34,29.07 29.57,29.07 29.58,29.08 29.63,29.08 v29.77,29.21
DD2_P  (via drill 0.2 pad 0.45)
  Top 0.192: v18.26,18.65 18.03,18.42 18.03,17.2 15.8,14.97 14.31,14.97 U3.1 13.01,14.55 12.92,14.64 12.63,14.64 12.62,14.64 11.58,14.64 11.47,14.52 11.03,14.52 10.86,14.7 10.38,14.7 J2.3 | U1.10 29.77,28.67 v29.77,28.63
  Bottom 0.192: v18.26,18.65 18.02,18.89 18.02,26.32 20.19,28.49 28.19,28.49 28.47,28.77 29.57,28.77 29.58,28.76 29.63,28.76 v29.77,28.63
DD3_N  (via drill 0.2 pad 0.45)
  Top 0.192: J3.2 54.65,14.7 53.79,14.7 53.69,14.6 53.31,14.6 53.27,14.64 52.25,14.64 52.24,14.64 51.95,14.64 51.86,14.55 51.1,14.55 U4.2 50.09,14.55 49.89,14.76 v49,14.76 | U1.17 32.27,27.16 32.37,27.26 32.37,28.23 v32.2,28.4
  Bottom 0.192: v32.2,28.4 32.36,28.24 32.36,17.61 35.07,14.89 48.86,14.89 v49,14.76
DD3_P  (via drill 0.2 pad 0.45)
  Top 0.192: J3.3 54.65,15.4 53.79,15.4 53.69,15.5 53.31,15.5 53.27,15.46 52.25,15.46 52.24,15.46 51.95,15.46 51.86,15.54 U4.1 50.09,15.54 49.89,15.34 v49,15.34 | U1.18 32.77,27.16 32.67,27.26 32.67,28.25 v32.82,28.4
  Bottom 0.192: v32.82,28.4 32.66,28.24 32.66,17.74 35.2,15.2 48.86,15.2 v49,15.34
DD4_N  (via drill 0.2, 0.2 pad 0.45)
  Top 0.192: U1.21 34.27,25.29 34.37,25.19 34.37,24.95 v34.22,24.8 | v46.9,41 46.9,41.2 46.5,41.6 44.79,41.6 44.35,42.05 44.21,42.18 43.82,42.57 R9.1
  Bottom 0.192: v34.22,24.8 34.37,24.95 34.37,26.5 35.27,27.41 43.01,27.41 48.5,32.9 48.5,39.58 47.08,41 v46.9,41
DD4_P  (via drill 0.2, 0.2 pad 0.45)
  Top 0.192: U1.22 34.77,25.29 34.67,25.19 34.67,24.95 v34.82,24.8 | v47.31,41.41 47.12,41.41 46.62,41.91 44.92,41.91 44.05,42.78 R10.1
  Bottom 0.192: v34.82,24.8 34.67,24.95 34.67,26.37 35.4,27.1 43.13,27.1 48.81,32.77 48.81,39.72 47.31,41.22 v47.31,41.41
GANG  (via drill 0.2 pad 0.45)
  Top 0.203: GANG.A 53.6,27.5 R5.2 53.5,28.5 50.2,31.8 45.51,31.8 v44.4,32.91 | U1.39 34.77,33.9 35.02,33.65 v38.75,33.65
  Bottom 0.203: v44.4,32.91 39.49,32.91 v38.75,33.65
GND  (via drill 0.2, 0.2 pad 0.45)  (1 unrouted)
  Top 0.203: 53.5,26 R5.1 | R8.2 45.16,27.86 v45.7,28.4 | U6.19 v29.7,46.86
  Top 0.305: U1.20 v33.77,27.78 | v41.36,33.5 C9.2 R22.1 | v34.65,20.6 34.65,21.45 C3.2 C6.2 35.4,22.75 v35.9,23.25 | U1.27 38.47,28.67 v38.5,28.7 | C7.2 v23.5,33.75 | C1.2 v23.5,35.42 | R25.1 v38.35,35.5 | C10.2 v32.23,38.08 | U1.2 27.61,32.67 v27.4,32.88 | U1.13 v29.25,26.08 | C8.2 v41.35,26.11 | v14.75,22.5 R2.1 | v50.8,22.34 R3.1 | J8.1 v27.28,5.4 | J8.4 v26.08,5.4 | J8.7 v24.88,5.4 | J8.10 v23.68,5.4 | J8.13 v22.48,5.4 | v52,28.6 R6.1 53.5,26.1 53.5,26 | J7.18 J7.17 J7.16 J7.15 J7.14 | J7.MP2 v33.7,12.04 | J7.MP1 v49.9,12.04 | U10.3 v25.58,31.91 | C5.2 v23.5,29.53 | U1.8 27.64,29.67 v27.4,29.43 | U$1.3 v28.45,9.4 | U$1.2 v28.95,9 | U$1.1 v29.45,9.4 | U$1.24 v17.95,9 | U$1.23 v18.45,9.4 | U$1.P$26 v16.71,11.6 | U$1.P$28 v22.52,12.4 | U$1.P$27 v24.88,12.4 | U$1.P$25 v30.69,11.6 | C22.2 v23.65,22.2 | Y2.4 v19.1,21.2 | Y2.2 v25.1,17.6 | C21.2 v19.1,23 | C26.2 v38.95,50.4 | C27.2 v31.5,53.6 | v28.15,51.8 C11.2 | C12.2 v20.05,51.8 | v32.55,41 C25.2 | Y1.4 v24.65,45 | C28.2 v26.1,41.35 | C14.2 v20.65,43.6 | Y1.2 v21.3,47.7 | C20.2 v22.85,50 | U5.4 44.92,44.4 v44.9,44.42 | v39.92,45.83 39.12,45.83 | 39.12,45.83 39.12,47.17 C34.2 39.7,47.2 39.9,47 v39.9,46.8 | C31.2 39.12,45.83 | S1.4 S1.3 v59.5,31.68 | S1.4 58.7,38.04 | 58.7,38.04 U9.3 v59.5,38.14 | 58.7,38.04 58.7,42.56 U9.4 v59.5,42.66 | S1.4 v59.5,36.2 | C29.2 C30.2 v34.92,38.8 | C32.2 v27.5,41.4 | U7.5 24.12,51.32 U7.2 v24.9,51.32 | C37.2 v38.5,41 | v40.75,41.75 C36.2 | U$1.22 v18.95,9 | U$1.6 v26.95,8.8 | U$1.9 v25.45,8.8 | U$1.12 v23.95,8.8 | U$1.15 v22.45,8.8
  Top 0.406: v29.15,38.75 C24.2 | C5.2 24.55,25.6 C4.2 23.55,25.55 v23.5,25.5 | C2.2 v23.5,26.86 | R21.1 24.3,28 v23.5,28 | U2.3 v11.31,33.55 | U3.3 v11.25,15.05 | U4.3 v53.5,15.05 | R4.1 v49.5,40.39 | R1.1 v16,40.39 | C17.1 v35.73,21.03 | v35.73,21.03 | C23.2 v42.6,28.43
  Top 0.508: C15.2 v46,38.5 | J6.A1B12 37.98,6.61 J6.SHIELD_1 v36.5,5.93 | J6.B1A12 45.28,6.61 J6.SHIELD_3 v47.25,5.93 | J1.S3 v1.64,38.75 | J1.S1 v7.74,38.75 | v1.64,28.75 J1.S4 | v7.74,28.5 J1.S2 | J1.4 v11.25,30.05 | J2.S3 v1.64,20 | J2.S1 v7.74,20.04 | v7.74,10 J2.S2 | J6.SHIELD_2 v36.5,1.75 | J6.SHIELD_4 v47.25,1.75 | J3.S2 v57.29,20 | J3.S4 v63.39,20 | v57.29,9.75 J3.S1 | J2.4 v11.25,11.55 | J3.4 55.5,18.34 v55.5,17.3 | U$3.2 v43.7,50
  other vias: 37,10.9 37.75,10.9 38.5,10.9 39.25,10.9 39.25,10.15 38.5,10.15 37.75,10.15 37,10.15 18.75,19.2 17,19.2 50.85,7.95 51.85,7.95 51.85,6.95 50.85,6.95 49.55,16.05 49.55,14.25 13.85,7.55 14.85,7.55 14.85,6.55 13.85,6.55 45,38.5 47.2,38.5 13.85,5.55 14.85,5.55 50.85,5.95 51.85,5.95 16.8,19.8 18.95,19.8 17.2,17.8 18.2,16.6 17.2,15.4 16,16.6 18.25,39.35 19.25,39.35 19.25,38.35 18.25,38.35 18.25,37.35 19.25,37.35 32.85,7.75 33.85,7.75 33.85,6.75 32.85,6.75 32.85,5.75 33.85,5.75 19.25,32.55 19.25,30.15 18.05,31.35 17.65,34.15 16.45,32.83 63.05,16.35 64.05,16.35 64.05,15.35 63.05,15.35 63.05,14.35 64.05,14.35 1.25,15.95 2.25,15.95 2.25,14.95 1.25,14.95 1.25,13.95 2.25,13.95 21.85,32.75 23.25,32.75 0.85,34.95 1.85,34.95 1.85,33.95 0.85,33.95 0.85,32.95 1.85,32.95 20.55,15.15 20.55,16.15 21.55,16.15 21.55,15.15 22.55,15.15 22.55,16.15 41.65,22.23 42.6,23.12 42.65,21.18 43.55,22.07 42.6,22.18 47.05,19.05 47.55,20.15 47.55,19.55 47.15,20.65 49.96,23.1 49.35,23.6 49.96,24.21 50.57,23.7 51.17,24.31 50.57,24.82 30.35,29.45 30.35,28.45 32.05,29.05 32.95,29.05 33.95,24.25 35.05,24.25 29.95,19.15 29.95,18.15 28.95,18.15 28.95,19.15 27.95,19.15 27.95,18.15 50.05,32.55 31.7,46.6 31.7,45.2 32.4,45.85 33.1,45.2 33.1,46.6 47.7,45.6 47.7,44.8 47.7,46.4 47.9,41.82 46.3,40.42 62.35,41.25 63.35,41.25 63.35,40.25 62.35,40.25 62.35,39.25 63.35,39.25 62.35,35.05 63.35,35.05 63.35,34.05 62.35,34.05 62.35,33.05 63.35,33.05 62.35,29.05 63.35,29.05 63.35,28.05 62.35,28.05 62.35,27.05 63.35,27.05 59.75,58.65 60.75,58.65 60.75,57.65 59.75,57.65 59.75,56.65 60.75,56.65 13.35,47.25 14.35,47.25 14.35,46.25 13.35,46.25 13.35,45.25 14.35,45.25 4.55,58.65 5.55,58.65 5.55,57.65 4.55,57.65 4.55,56.65 5.55,56.65
  pour Top (isolate 0.406, rank 3): -4.33,63.67 -4.33,-3.6 70.04,-3.6 70.04,63.67
  pour Bottom (isolate 0.61, rank 3): -5.6,64.94 -5.6,-4.87 71.31,-4.87 71.31,64.94
  pour Route2: -6.9,66.2 -6.9,-6.4 72.7,-6.4 72.7,66.2
  pour Route15: -8.3,67.4 -8.3,-8 74.1,-8 74.1,67.4
  pour Top (no thermals): 51.75,24.25 49.6,26.4 47.57,24.37 49.72,22.22
  pour Top (no thermals): 40.7,23.6 41.5,22.8 40.9,22.2 42.6,20.5 44.3,22.2 42.6,23.9 41.7,23 40.9,23.8
  pour Top (no thermals): 43.05,20.55 44.91,18.69 arc45 45.13,18.6 47.17,18.6 arc45 47.39,18.69 48.01,19.31 arc45 48.1,19.53 48.1,20.57 arc45 48.01,20.79 47.89,20.91 arc45 47.67,21 45,21 44.25,21.75
  pour Top (no thermals): 36.72,8.9 39.38,8.9 arc90 39.7,9.22 39.7,10.98 arc90 39.38,11.3 36.72,11.3 arc90 36.4,10.98 36.4,9.22 arc90
GND\  (via drill 0.2 pad 0.45)
  Top 0.406: C19.1 v36.82,23.52 v36.81,23.51
GPIO1/CS  (via drill 0.2)
  Top 0.102: U6.3 v34.2,50.2
  Bottom 0.102: v34.2,50.2 33.3,49.3 33.3,48.27 33.77,47.8 46.05,47.8 U$3.5
GPIO2/CLK  (via drill 0.2)
  Top 0.102: U6.4 v33.8,48.4
  Bottom 0.102: v33.8,48.4 34,48.2 45.2,48.2 U$3.4
GPIO3/MOSI  (via drill 0.2)
  Top 0.102: v33.6,50.2 33.4,50 U6.5
  Bottom 0.102: v33.6,50.2 35.6,52.2 42.5,52.2 44.95,49.75 U$3.3
GPIO4/RST  (via drill 0.2)
  Top 0.102: U6.6 v33,50.4
  Bottom 0.102: v33,50.4 35.4,52.8 42.9,52.8 45.3,50.4 49.95,50.4 U$2.1
GPIO5/DC  (via drill 0.2)
  Top 0.102: v32.4,50.2 32.6,50 U6.7
  Bottom 0.102: v32.4,50.2 32.6,50 32.6,48.3 33.5,47.4 46.9,47.4 48.7,49.2 U$3.6
GPIO6/BTN  (via drill 0.2)
  Top 0.102: U6.8 v32.2,48.21 v32.2,48.2 | v50.5,50.59 50.5,50 49.9,49.4 U$2.2
  Bottom 0.102: v32.2,48.2 31.7,48.7 31.7,50.2 34.83,53.33 43.38,53.33 45.7,51 50.09,51 v50.5,50.59
GREEN_1
  Top 0.203: U1.45 31.75,34.78 31.75,36 30.9,36.86 27.89,36.86 22.5,42.25 13.5,42.25 11.72,40.47 LED2.A
GREEN_2  (via drill 0.2 pad 0.45)
  Top 0.203: U1.35 35.35,32.67 34.51,31.84 31.49,31.84 26.91,36.41 23.93,36.41 23.73,36.21 v22.23,36.21 | v11.75,22.25 11.75,21.31 LED4.A
  Bottom 0.203: v11.75,22.25 12.2,22.7 12.2,27.7 20.71,36.21 v22.23,36.21
GREEN_3  (via drill 0.2 pad 0.45)
  Top 0.203: U1.32 38.08,31.17 v38.53,30.73 | v53.5,22.5 v53.51,22.49 LED6.A
  Bottom 0.203: v38.53,30.73 38.53,30.12 36.82,28.42 35.24,28.42 33.1,26.27 33.1,23.9 34.6,22.4 39,22.4 43.4,18 50,18 53.5,21.5 v53.5,22.5
GREEN_4  (via drill 0.2 pad 0.45)
  Top 0.203: LED8.A 53.25,40.36 v53.25,41.25 | U1.23 35.27,25.13 v35.6,24.8
  Bottom 0.203: v53.25,41.25 v53.25,38 53.25,37.45 52.54,36.74 52.54,31.43 47.62,26.51 45.32,26.51 44.02,25.21 36.78,25.21 36.29,24.72 35.91,24.72 35.83,24.8 v35.6,24.8
HDMI1_CEC  (via drill 0.2 pad 0.45)
  Top 0.126: v21.7,5.4 22.08,5.78 J8.14 22.08,7.32 21.95,7.45 U$1.16
  Bottom 0.126: v21.7,5.4 22.1,5.8
HDMI1_CLK_N
  Top 0.126: U$1.14 23.05,7.9 23.05,7.35 22.88,7.18 J8.12
HDMI1_CLK_P
  Top 0.126: U$1.13 23.35,7.9 23.35,7.25 23.28,7.18 J8.11
HDMI1_HOTPLUG
  Top 0.305: J8.19 19.73,6.47 19.45,6.75 U$1.21
HDMI1_SCL
  Top 0.126: J8.15 21.68,7.22 21.45,7.45 U$1.17
HDMI1_SDA  (via drill 0.2 pad 0.45)
  Top 0.126: v20.9,5.4 21.28,5.78 J8.16 21.28,7.12 20.95,7.45 U$1.18
  Bottom 0.126: v20.9,5.4 21.3,5.8
HDMI1_TX0_N
  Top 0.126: U$1.11 24.55,7.9 24.55,7.55 24.08,7.08 J8.9
HDMI1_TX0_P
  Top 0.126: U$1.10 24.85,7.9 24.85,7.45 24.48,7.08 J8.8
HDMI1_TX1_N
  Top 0.126: U$1.8 25.95,7.65 25.28,6.98 J8.6
HDMI1_TX1_P
  Top 0.126: J8.5 25.68,6.98 26.1,7.4 26.24,7.4 26.45,7.61 U$1.7
HDMI1_TX2_N
  Top 0.126: U$1.5 27.45,7.57 27.28,7.4 26.9,7.4 26.48,6.98 J8.3
HDMI1_TX2_P
  Top 0.126: J8.2 26.88,7 27.05,7.17 27.09,7.17 | 27.09,7.17 | U$1.4 27.95,7.72 27.39,7.17 27.09,7.17
HDMI_5.0V
  Top 0.305: U$1.20 19.95,7.55 20.48,7.02 J8.18
N$1
  Top 0.203: R6.2 52,25 52.5,24.5 54.5,24.5 55,25 GANG.C
N$2
  Top 0.203: LED2.C LED1.C 14.58,38.85 R1.2
N$3
  Top 0.305: Y2.1 21.5,18.8 22.3,19.6 22.3,22.5 C21.1 23,24.2 30.1,24.2 30.77,24.87 U1.14
N$4
  Top 0.305: Y2.3 25.35,21.45 C22.1 29.55,23 31.27,24.72 U1.15
N$5  (via drill 0.2)
  Top 0.305: C32.1 27.5,44.8 27.96,45.26 U6.23 29.7,45.26 v29.9,45.46 | U6.50 36.31,46.06 36.85,46.6 | 36.85,46.6 C34.1 | v33.7,43.6 34.16,44.06 U6.45 40.15,44.06 C33.1 | 36.85,46.6 v36.7,46.6
  Route2 0.305: v36.7,46.6 v33.7,43.6
  Bottom 0.305: v33.7,43.6 33.1,43.6 32.3,44.4 31.56,44.4 30.5,45.46 v29.9,45.46
N$5_N
  Top 0.192: U6.46 36.64,44.46 36.7,44.52 41.69,44.52 42.05,44.15 42.15,44.05 42.53,43.67 R9.2
N$5_P
  Top 0.192: U6.47 36.64,44.86 36.7,44.8 41.8,44.8 42.72,43.88 43.22,43.88 R10.2
N$6
  Top 0.203: LED4.C LED3.C 14.7,19.78 R2.2
N$7
  Top 0.203: R3.2 52.2,19.74 LED5.C LED6.C
N$8
  Top 0.203: U8.14 38.64,19.27 R7.2
N$9
  Top 0.203: LED8.C LED7.C 50.66,38.85 R4.2
N$10
  Top 0.305: U5.8 51.45,46.8 C35.2
N$11
  Top 0.406: C18.2 45.44,23.95 U8.2
N$12
  pour Top (no thermals): 45,23 44.5,22.5 44.5,21.9 45.01,21.39 arc45 45.23,21.3 47.1,21.3 48.5,22.7 47.65,23.55 46.7,22.6 45.9,22.6 45.5,23
N$13
  Top 0.406: C19.2 39.1,24.64 U8.11
N$14
  Top 0.203: U8.9 40.83,24.33 | 40.83,24.33 | R8.1 43.46,26.1 42.1,26.1 40.83,24.83 40.83,24.33
N$15
  Top 0.305: R14.1 R13.2 R12.1 55.1,44.35 55.1,43.2 55.64,42.66 U9.2 U9.1
N$16
  Top 0.102: R15.2 22.35,43.35 C14.1 Y1.3
N$17
  Top 0.305: U6.43 36.4,42.7 R16.1 38.35,42.7 38.48,42.83 | C37.1 38.27,42.83 38.48,42.83 | C36.1 39.67,42.83 38.48,42.83
N$18  (via drill 0.2)
  Top 0.102: CR1.1 51.1,51.2 53.5,48.8 v53.5,43.8
  Top 0.203: R12.2 v57.7,44.4
  Bottom 0.102: v53.5,43.8 54.1,44.4 v57.7,44.4
N$34
  Top 0.203: U1.11 28.64,28.2 R21.2
N$35
  Top 0.203: C23.1 R23.1 39.65,31.09 R22.2
  Top 0.305: C23.1 39.39,28.17 U1.26
N$36
  Top 0.305: R24.1 38.15,38 R25.2 35.77,35.62 U1.37
QSPI_CS
  Top 0.102: U5.1 45.33,46.4 43.1,46.4 40.64,48.86 38.7,48.86 | 38.7,48.86 36.24,48.86 U6.56 | 38.7,48.86 39.5,49.66 39.5,51.15 CR1.2
QSPI_SCLK  (via drill 0.2)
  Top 0.102: U6.52 35.16,46.86 v34.5,46.2 | U5.6 v50.5,45.2
  Bottom 0.102: v34.5,46.2 34.3,46 34.3,44.6 35.3,43.6 49.1,43.6 50.5,45 v50.5,45.2
QSPI_SD0  (via drill 0.2)
  Top 0.102: U6.53 34.77,47.26 v34.31,46.8 | U5.5 v50.5,44.4
  Bottom 0.102: v34.31,46.8 33.9,46.39 33.9,44.4 35.1,43.2 49.3,43.2 v50.5,44.4
QSPI_SD1
  Top 0.102: U5.2 42.9,46 40.44,48.47 36.71,48.47 36.3,48.06 U6.55
QSPI_SD2
  Top 0.102: U5.3 45.7,45.2 45.3,45.6 42.7,45.6 40.3,48 36.84,48 36.5,47.66 U6.54
QSPI_SD3  (via drill 0.2)
  Top 0.102: v34.9,45.6 34.9,45.87 35.48,46.46 U6.51 | U5.7 v50.5,46
  Bottom 0.102: v34.9,45.6 34.7,45.4 34.7,44.8 35.5,44 48.9,44 49.7,44.8 49.7,45.2 v50.5,46
RUN  (via drill 0.2)
  Top 0.102: U6.26 v29.7,44.06 | v55.1,37 55.9,36.2 S1.2
  Top 0.305: R11.1 56.5,30.15 S1.1 S1.2
  Bottom 0.102: v55.1,37 55.1,40.8 53.52,42.38 31.38,42.38 v29.7,44.06
SWCLK  (via drill 0.2)
  Top 0.102: U6.24 30.38,44.86 v30.4,44.84 | SWCLK.TP v18.1,41
  Bottom 0.102: v18.1,41 18.7,41.6 24.1,41.6 27.34,44.84 v30.4,44.84
SWDIO  (via drill 0.2)
  Top 0.102: U6.25 29.52,44.46 29.53,44.46 30.04,44.46 v30.5,44 | SWDIO.TP v20.5,41
  Bottom 0.102: v20.5,41 24.3,41 27.9,44.6 29.9,44.6 v30.5,44
USER_SW  (via drill 0.2)
  Top 0.102: U6.35 v32.2,43.4
  Top 0.203: R14.2 v56.75,48.2
  Bottom 0.102: v32.2,43.4 32.83,42.77 51.88,42.77 56.75,47.65 v56.75,48.2
VBUS  (via drill 0.2 pad 0.45)
  other vias: 39.38,8.18 44.3,8.18 44.9,8.18 45.5,8.18 39.38,7.6 38.78,8.18 38.18,8.2 37.58,8.22 44.3,7.6 44.9,7.6 38.78,7.6 38.18,7.6 37.58,7.62 45.5,7.6 46.1,8.18 46.1,7.6
  pour Top (no thermals): 37.52,8.6 39.28,8.6 arc-90 39.6,8.28 39.6,6.2 39.12,6.2 39.12,7.25 37.52,7.25 arc-90 37.2,7.57 37.2,8.28 arc-90
  pour Bottom: 46.5,8.6 37.42,8.6 arc90 37.1,8.28 37.1,7.52 arc90 37.42,7.2 46.5,7.2
  pour Top (no thermals): 43.9,7.4 43.9,6.32 arc90 44.22,6 arc90 44.5,6.28 44.5,7.4
  pour Top (no thermals): 42.5,20.3 41.52,21.28 arc90 41.08,21.28 40.22,20.42 arc90 40.22,19.98 43.81,16.39 arc-45 43.9,16.17 43.9,7.3 46.18,7.3 arc90 46.41,7.52 46.41,16.89 43,20.3
VCC
  Top 0.305: C17.2 R7.1 | R7.1 39.14,20.47 U8.13
  Top 0.406: R7.1
VCC_5V  (via drill 0.2, 0.2 pad 0.45)
  Top 0.203: VCC_5V.TP 37.5,15.2 40.3,12.4 42,12.4 43.05,11.35 v43.05,11
  Top 0.305: v31.75,33.5 31.2,33.5 30.77,33.94 U1.47 | v43.05,5.6 43.03,5.57 J6.A8 J7.7 43.03,10.97 v43.05,11 | U7.4 22.07,50.68 C12.1 22.07,51.32 U7.3
  Top 0.508: R23.2 v42.65,29.76
  Top 0.61: v20.3,49.6 v20.7,50 20.77,50.07 20.78,50.07 21.03,50.32 21.03,50.33 v21.1,50.4 21.7,51 C12.1
  Top 0.813: J1.1 v11.1,37.05 | v9.7,19.75 9.7,18.59 J2.1 | J3.1 55.24,11.6 v53.9,11.6
  Route2 0.305: v43.05,5.6 v43.05,11 43.05,19.55 44.8,21.3 v44.8,24.8
  Route2 0.61: v31.75,33.5 31.77,33.5 33.02,32.25
  Route2 0.813: v42.65,29.76 35.51,29.76 33.02,32.25 33,32.25 v31.75,33.5 30.65,34.6 19.7,34.6 | v47.5,28.3 47.5,21.5 51.3,17.7 51.3,12.5 52.2,11.6 v53.9,11.6 | 19.7,34.6 19.1,34.6 16.65,37.05 16.1,37.05 | v11.1,37.05 16.1,37.05 | v9.7,19.75 10.7,20.75 10.7,25.6 19.7,34.6 | v20.3,49.6 17.1,46.4 17.1,38.05 16.1,37.05
  other vias: 43.35,29.76 44.05,29.76 46.5,29.3 46.9,29.8 47,28.8 47.4,29.3 47.9,28.8
  pour Top (no thermals): 48.2,26.6 46.3,24.7 45.7,24.7 44.22,23.22 arc-90 43.78,23.22 42.7,24.3 42.27,23.87 arc-90 41.83,23.87 41.57,24.13 arc-90 41.57,24.57 42.6,25.6 44.8,25.6 47,27.8
  pour Top (no thermals): 46.8,27.6 46.8,28.3 45.9,29.2 41.12,29.2 arc-90 40.8,29.52 40.8,29.98 arc-90 41.12,30.3 46.77,30.3 arc-45 46.99,30.21 48.21,28.99 arc-45 48.3,28.77 48.3,26.7 46.8,25.2 45.6,26.4
VCC_A  (via drill 0.2)
  Top 0.305: C5.1 26.89,30.17 U1.7 29.67,30.17 30,30.5 30,30.75 | C6.1 C3.1 | C6.1 31.77,23.88 U1.16 31.77,26.98 31.43,27.32 | C6.1 33.27,23.12 U1.19 | C1.1 26.35,35.4 C7.1 26.35,33.67 v28.18,33.67 U1.1 29.58,33.17 30,32.75 30,30.75 | C4.1 26.25,25.6 C2.1 27.87,26.86 U1.12 31.08,27.67 31.43,27.32 | 30,30.75 30.02,30.73 30.75,30.73 31.43,30.06 31.43,27.32 | VCC_A.TP v20.9,37.4
  Bottom 0.305: v28.18,33.67 24.32,37.52 21.02,37.52 v20.9,37.4
VCC_D  (via drill 0.2, 0.2 pad 0.45)
  Top 0.203: VCC_D.TP v23.1,38.2
  Top 0.305: U1.25 37.45,27.59 | 37.45,27.59 37.95,27.09 C8.1 | C9.1 39.39,32.17 U1.34 35.45,32.17 34.25,30.97 34.25,28.4 35.06,27.59 37.45,27.59 | 34.88,37.12 C10.1 33.96,36.42 32.27,36.42 | 34.88,37.12 35.27,36.73 U1.38 | R24.2 35.75,38 34.88,37.12 | U1.48 v30.27,35.94 | 32.27,36.42 v31.94,36.75 30.94,37.75 C24.1 | 32.27,36.42 U1.44
  Top 0.61: C15.1 40.95,36.95 39.66,35.66 C9.1
  Top 0.813: R24.2 36.65,38.15 38.1,39.6 39.7,39.6 40.95,38.35 40.95,36.95
  Bottom 0.305: v30.27,35.94 30.27,35.95 31.01,36.69 | 31.01,36.69 31.07,36.75 v31.94,36.75 | v23.1,38.2 29.5,38.2 31.01,36.69
XTAL_IN
  Top 0.203: Y1.1 26,47.7 27.24,46.46 U6.20
  Top 0.305: C20.1 24.65,49.1 Y1.1
XTAL_OUT
  Top 0.203: U6.21 27.04,46.06 26.3,46.8 23.9,46.8 23.5,46.4 23.5,43.5 R15.1

## Text on the board
tPlace: MOSI | CLk | CS | DC | BTN | RST | 3V3 | GND | R25: / DNP for self-powered applications | + | Raspberry Pi Pico | BOOT | RST | 4-Port USB Hub | 5V2A Buck Converter
tNames: SSD1351 OLED Pins | 4 Port USB Hub / CM4 Docking Station / StonedEdge | RP2040 | CY7C65642 | C18 | MAXM17634 | J9 | J6